# Altium PCB ROBOT_CONTROL.PcbDoc (part 1 of 2)
Units mm, origin at the board's own origin, x right, y up, seen from the top; angles counter-clockwise.
Board outline 110.37 x 59.34 mm, 2 copper layers (Top Layer, Bottom Layer); 66 components, 79 nets, 370 pads, 125 vias.
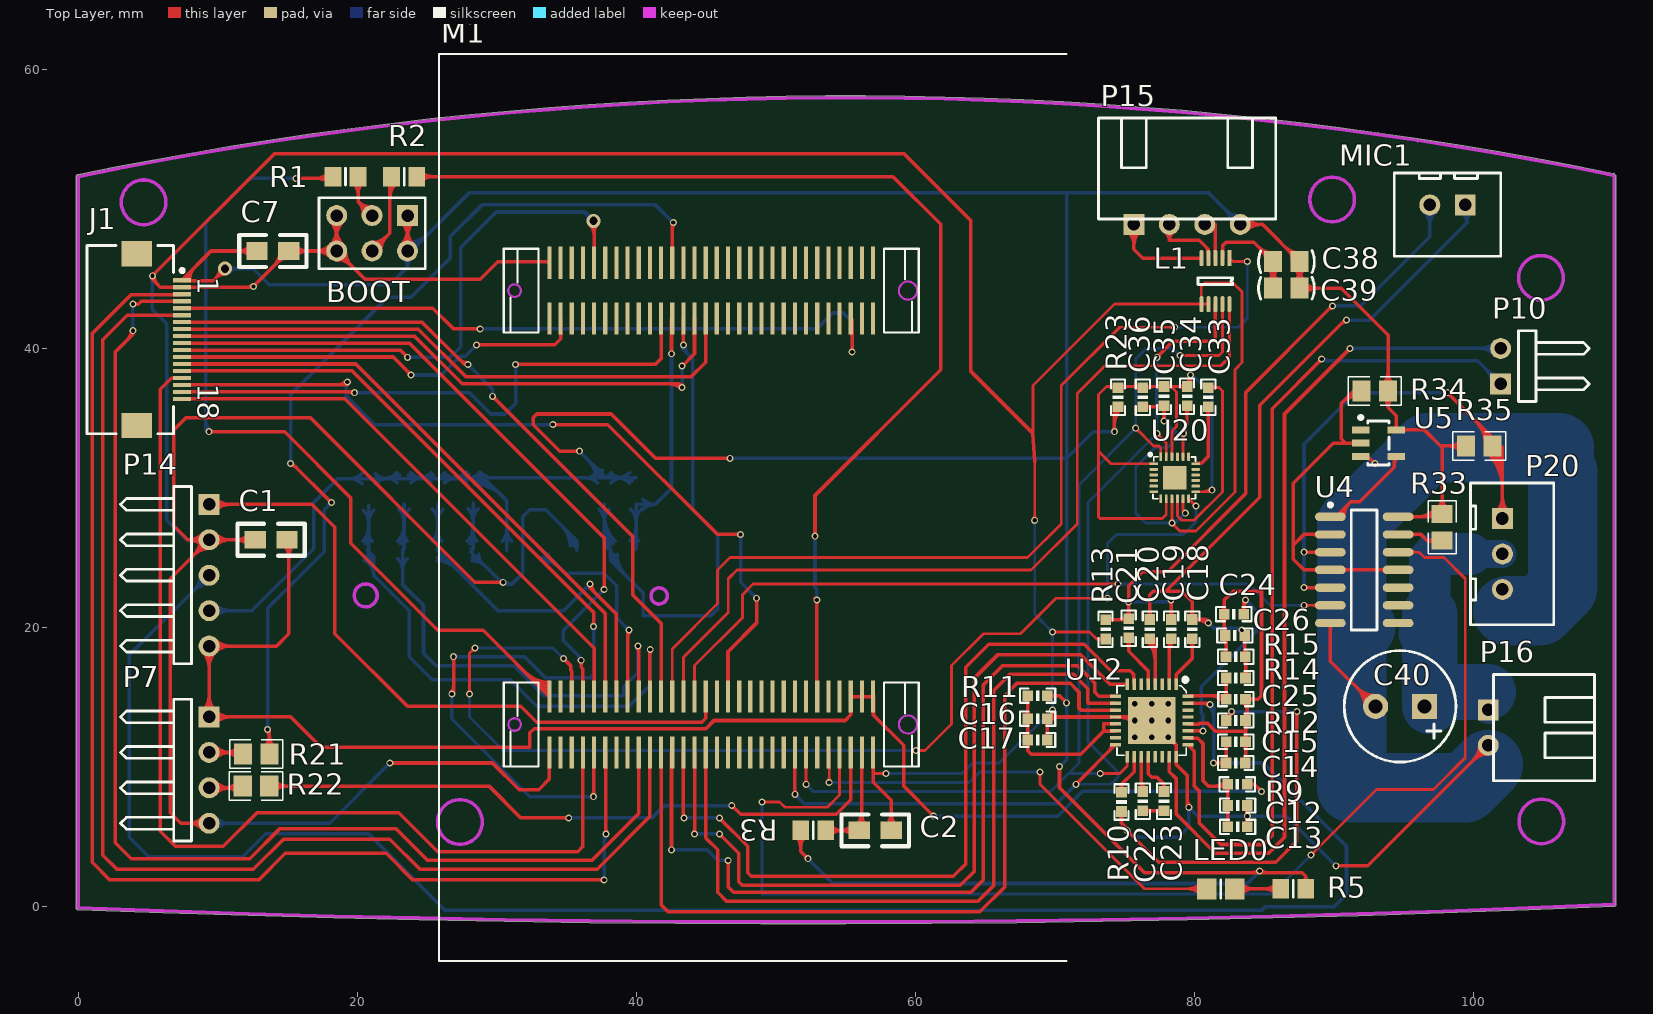
[diagram p0: Top Layer view]
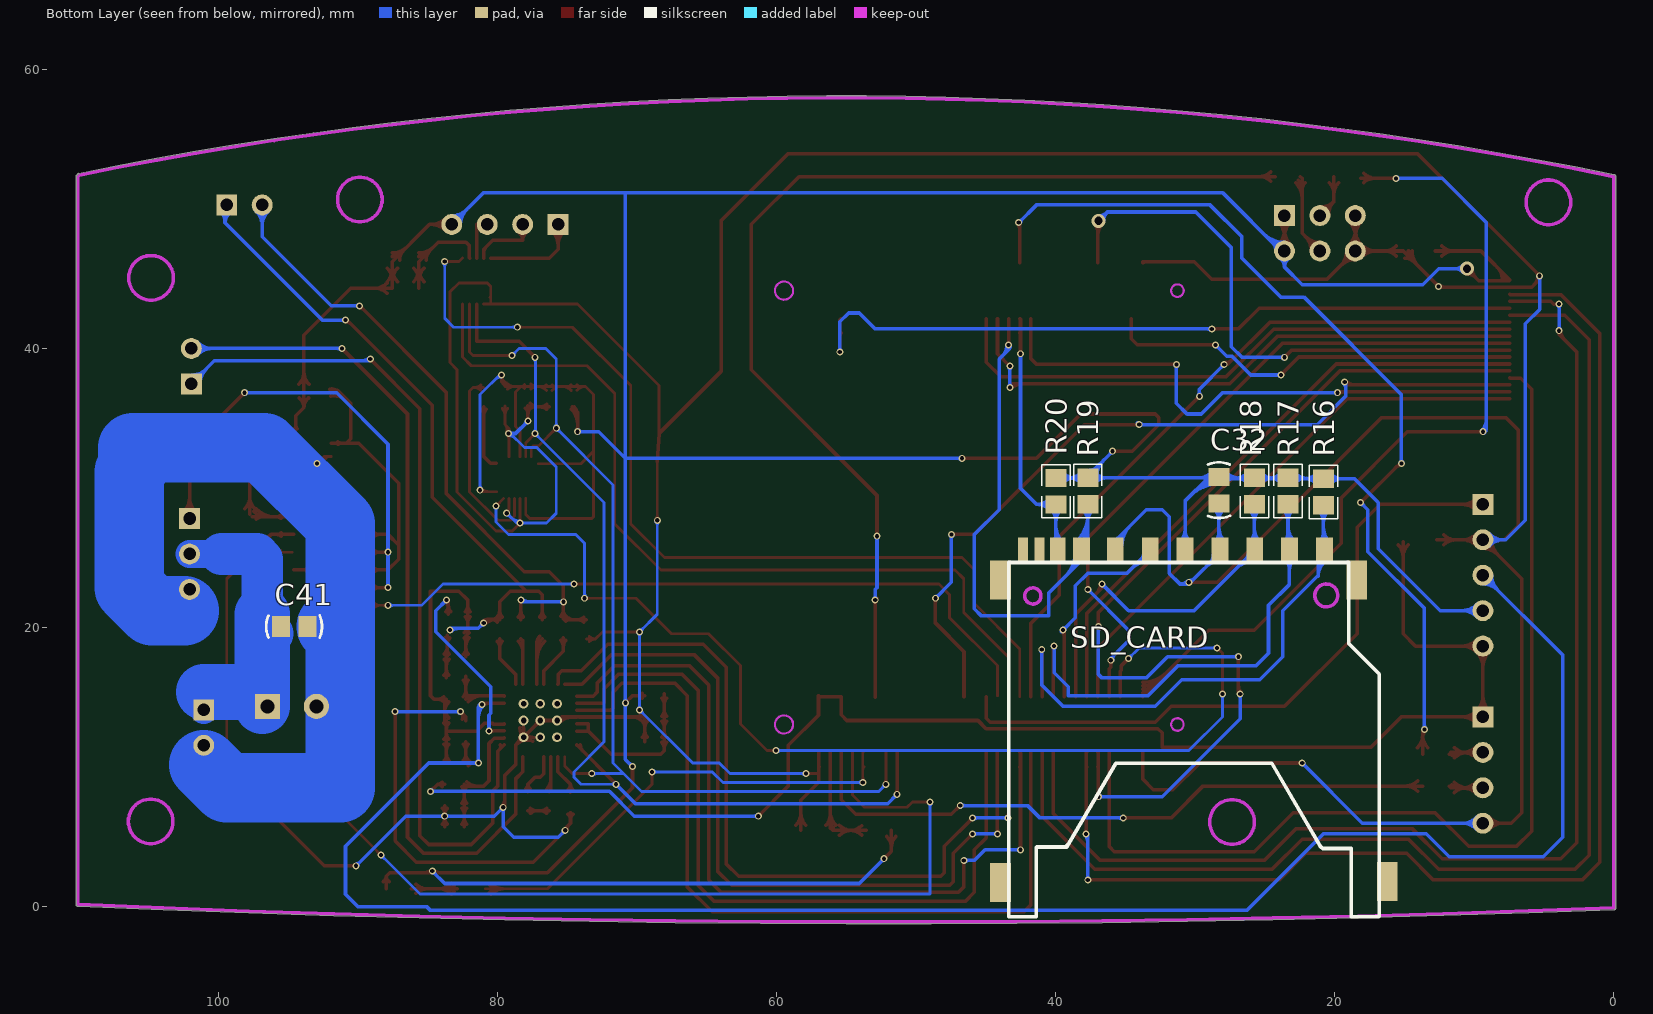
[diagram p1: Bottom Layer view, seen from below]

## Layer stack, top to bottom
Top Solder: solder mask 0.0102, Solder Resist, Dk 3.5
Top Layer: signal copper 0.0356
Dielectric1: dielectric 0.32, FR-4, Dk 4.8
Bottom Layer: signal copper 0.0356
Bottom Solder: solder mask 0.0102, Solder Resist, Dk 3.5

## Board outline
-0.12,-0.043 cw(c0,0) -0.127,0 -0.127,52.324 cw(c0,52.324) -0.01,52.451 cw(c0.026,52.329) 0.001,52.454 cw(c55.245,-214.452) 110.042,52.546 cw(c110.016,52.421) 110.141,52.447 cw(c110.109,52.324) 110.236,52.324 110.236,0.15 cw(c110.109,0.15) 110.104,0.023 cw(c52.086,1335.3) -0.009,-0.222 cw(c-0.004,-0.094)

## Design rules (kind name [scope] priority, off if disabled: settings)
Clearance [All] p1: gap=0.2 ignorepadtopadclearanceinfootprint=FALSE except(0: Arc-Hole Track-Hole SMDPad-Hole THPad-Hole Via-Hole Fill-Hole Poly-Hole Region-Hole Text-Hole)
PolygonConnect [All] p1: connectstyle=Relief reliefconductorwidth=0.254 reliefentries=4 polygonreliefangle="90 Angle" airgapwidth=0.254
RoutingVias [All] p1: holewidth=0.711 width=1.27 viastyle="Through Hole" minholewidth=0.711 minwidth=1.27 maxholewidth=0.711 maxwidth=1.27
SilkToSolderMaskClearance SilkscreenOverComponentPads [IsPad] p1: minsilkscreentomaskgap=0.254 clearancetoexposedcopper=TRUE
SolderMaskExpansion [All] p1: expansion=0.102
Width [All] p1: maxlimit=5 minlimit=0.203 preferedwidth=0.254
29 further rules are at their usual default settings.

## Components (designator, comment, footprint, x,y, rotation, side; value= is the part's Value field where it differs from the comment)
BOOT "Header 3X2" HDR2X3 23.622,49.53 r180 top
C1 "104" 0805 12.7,26.289 r0 top
C2 "104" 0805 58.293,5.459 r180 top
C7 "104" 0805 12.827,46.992 r0 top
C12 "10uF" 0603P 83.121,7.237 r180 top
C13 "104" 0603P 83.121,5.713 r180 top
C14 "104" 0603P 82.982,10.287 r0 top
C15 "10uF" 0603P 82.995,11.813 r0 top
C16 "10uF" 0603P 68.783,13.462 r180 top
C17 "104" 0603P 68.783,11.938 r180 top
C18 "1uF" 0603P 79.881,19.875 r90 top
C19 "1uF" 0603P 78.357,19.875 r90 top
C20 "1uF" 0603P 76.833,19.875 r90 top
C21 "1uF" 0603P 75.311,19.939 r90 top
C22 "104" 0603P 76.329,7.556 r270 top
C23 "104" 0603P 77.853,7.556 r270 top
C24 "10uf" 0603P 82.855,20.955 r0 top
C25 "10uf" 0603P 83.007,14.859 r180 top
C26 "221" 0603P 82.931,19.431 r0 top
C32 "Cap" C-RAD-0805 28.321,29.845 r90 bottom
C33 "Cap" 0603P 81.026,36.5 r90 top
C34 "Cap" 0603P 79.502,36.576 r90 top
C35 "Cap" 0603P 77.851,36.576 r90 top
C36 "Cap" 0603P 76.327,36.5 r90 top
C38 "Cap" C-RAD-0805 86.622,46.228 r180 top
C39 "Cap" C-RAD-0805 86.622,44.323 r180 top
C40 "Cap Pol" C-RB-8 96.52,14.351 r180 top
C41 "Cap" C-RAD-0805 94.615,20.066 r0 bottom
J1 "CL586-0553-7" FH12A-18S-0.5SH 5.842,40.64 r270 top
L1 "SN3193" DFN_10 82.534,46.482 r270 top
LED0 "LED1" 6-0805_M 81.915,1.27 r180 top
M1 "STM32F4&F7_CB" STM32F4&F7_CB 56.995,11.049 r90 top
MIC1 "MIC" HDR2X1_B1 99.441,50.292 r180 top
P7 "SCREEN" HDR1X4H 9.398,13.589 r270 top
P10 "horn" HDR1X2H 101.981,37.465 r90 top
P14 "Header 5" HDR1X5H 9.398,28.829 r270 top
P15 "Header 4" HDR4X1_B2 75.692,48.895 r0 top
P16 "Header 2" HDR2X1_B2 101.092,14.097 r270 top
P20 "Header 3" HDR3X1_B1 102.108,27.813 r270 top
R1 "Res2" 6-0805_N 19.177,52.324 r0 top
R2 "Res2" 6-0805_N 23.379,52.324 r0 top
R3 "Res2" 6-0805_N 52.705,5.461 r180 top
R5 "Res2" 6-0805_N 87.111,1.27 r0 top
R9 "0R" 0603P 83.109,8.763 r0 top
R10 "10K" 0603P 74.803,7.493 r90 top
R11 "10R" 0603P 68.783,15.113 r180 top
R12 "0R" 0603P 82.995,13.337 r0 top
R13 "0R" 0603P 73.66,19.863 r90 top
R14 "680R" 0603P 82.995,16.385 r0 top
R15 "47K" 0603P 82.982,17.907 r0 top
R16 "Res1" 0805-1 20.828,29.718 r90 bottom
R17 "Res1" 0805-1 23.368,29.784 r90 bottom
R18 "Res1" 0805-1 25.781,29.784 r90 bottom
R19 "Res1" 0805-1 37.719,29.784 r90 bottom
R20 "Res1" 0805-1 40.005,29.779 r90 bottom
R21 "Res1" 0805-1 12.766,10.922 r180 top
R22 "Res1" 0805-1 12.761,8.636 r180 top
R23 "Res1" 0603P 74.551,36.512 r270 top
R33 "Res1" 0805-1 97.79,27.178 r90 top
R34 "Res1" 0805-1 92.964,36.957 r0 top
R35 "Res1" 0805-1 100.457,33.02 r180 top
SD_CARD "sd card" SDCARD_L 23.266,25.562 r180 bottom
U4 "74HC126D" SOP-14N 92.202,24.13 r0 top
U5 "SN74AHV" SOT-23-5 91.948,34.163 r0 top
U12 "WM8978" qfn32 76.962,13.335 r270 top
U20 "MPU9250" QFN24-t 77.114,31.737 r0 top

## Footprints (in the part's own frame and the unit in brackets; to place one, negate y for a bottom-side part, rotate by r counter-clockwise, add the part's x,y. Pads: shape width x height; smd on the part's side, far side on the other; paste and mask are expansions set on the pad)
6-0805_M [mm] "Chip Resistor, Body 2.0x1.2mm, IPC Low Density"
  rect 1.4x1.5 smd: 1(-1,0) 2(1,0)
  silkscreen extent 0,-0.65 0,0.65, body extent -1.07,-0.7 1.07,0.7, height 0.7
6-0805_N [mm] "Chip Resistor, Body 2.0x1.2mm, IPC Medium Density"
  rect 1.2x1.4 smd: 1(-0.9,0) 2(0.9,0)
  silkscreen extent 0,-0.6 0,0.6, body extent -1.07,-0.7 1.07,0.7, height 0.7
0603P [mil]
  rect 30x30 smd: 1(-27,0) 2(27.5,-0.06)
  silkscreen extent -50,-20 50,20
0805 [mil]
  rect 60x50 smd: 1(0,-0.06) 2(90,-0.06)
  silkscreen extent -50,-45 140,45
0805-1 [mm] "贴片带丝印"
  rect 1.3x1.5 smd: 1(-0.95,0) 2(0.95,0)
  silkscreen extent -1.91,-1.02 1.91,1.02, body extent -1.14,-0.51 1.14,0.51, height 1
C-RAD-0805 [mm] "贴片电容"
  rect 1.3x1.5 smd: 1(-0.95,0) 2(0.95,0)
  silkscreen extent -2,-0.79 2,0.79, body extent -1.27,-0.64 1.27,0.64, height 0.9
C-RB-8 [mm] "35V 220UF电容"
  rect 1.8x1.8 hole 1: 1(0,0)
  round 1.8 hole 1: 2(3.5,0)
  silkscreen extent -2.25,-4 5.75,4
DFN_10 [mm]
  rect 1.16x0.3 smd: 1(0,0)
  oval 1.16x0.3 smd: 2(0,-0.5) 3(0,-1) 4(0,-1.5) 5(0,-2) 6(3.3,-2) 7(3.3,-1.5) 8(3.3,-1) 9(3.3,-0.5) 10(3.3,0)
  silkscreen extent 1.41,-2.25 1.89,0.25
FH12A-18S-0.5SH [mm] "Connector; FH12 Series; 18 Position; 0.5mm Spaced Top Contact"
  rect 0.3x1.3 smd: 1(-4.25,1.625) 2(-3.75,1.625) 3(-3.25,1.625) 4(-2.75,1.625) 5(-2.25,1.625) 6(-1.75,1.625) 7(-1.25,1.625) 8(-0.75,1.625) 9(-0.25,1.625) 10(0.25,1.625) 11(0.75,1.625) 12(1.25,1.625) 13(1.75,1.625) 14(2.25,1.625) 15(2.75,1.625) 16(3.25,1.625) 17(3.75,1.625) 18(4.25,1.625)
  rect 1.8x2.2 smd: 19(-6.15,-1.625) 20(6.15,-1.625)
  silkscreen extent -6.75,-5.2 6.75,1.75
HDR1X2H [mm] "Connector; Header; 2 Position; Right Angle"
  rect 1.5x1.5 hole 0.9: 1(0,0)
  round 1.5 hole 0.9: 2(2.54,0)
  silkscreen extent -1.27,-6.35 3.81,-1.27
HDR1X4H [mm] "Connector; Header; 4 Position; Right Angle"
  rect 1.5x1.5 hole 0.9: 1(0,0)
  round 1.5 hole 0.9: 2(2.54,0) 3(5.08,0) 4(7.62,0)
  silkscreen extent -1.27,-6.35 8.89,-1.27
HDR1X5H [mm] "Connector; Header; 5 Position; Right Angle"
  rect 1.5x1.5 hole 0.9: 1(0,0)
  round 1.5 hole 0.9: 2(2.54,0) 3(5.08,0) 4(7.62,0) 5(10.16,0)
  silkscreen extent -1.27,-6.35 11.43,-1.27
HDR2X1_B1 [mm] "Connector; Header; 4 Position"
  rect 1.5x1.5 hole 0.9: 1(0,0)
  round 1.5 hole 0.9: 2(2.54,0)
  silkscreen extent -2.54,-2.29 5.08,3.68, body extent -2.41,-2.16 5.08,3.56, height 1.5
HDR2X1_B2 [mm] "Connector; Header; 4 Position"
  rect 1.5x1.5 hole 0.9: 1(0,0)
  round 1.5 hole 0.9: 2(2.54,0)
  silkscreen extent -2.54,0.38 5.08,7.62, body extent -2.54,0.38 5.08,7.62, height 1.5
HDR2X3 [mm]
  rect 1.5x1.5 hole 0.9: 1(0,0)
  round 1.5 hole 0.9: 2(0,2.54) 3(2.54,0) 4(2.54,2.54) 5(5.08,0) 6(5.08,2.54)
  silkscreen extent -1.27,-1.27 6.35,3.81
HDR3X1_B1 [mm] "Connector; Header; 3 Position"
  rect 1.5x1.5 hole 0.9: 1(0,0)
  round 1.5 hole 0.9: 2(2.54,0) 3(5.08,0)
  silkscreen extent -2.54,-2.29 7.62,3.68, body extent -2.54,-2.29 7.62,3.68, height 1.5
HDR4X1_B2 [mm] "Connector; Header; 4 Position"
  rect 1.5x1.5 hole 0.9: 1(0,0)
  round 1.5 hole 0.9: 2(2.54,0) 3(5.08,0) 4(7.62,0)
  silkscreen extent -2.54,0.38 10.16,7.62, body extent -2.54,0.38 10.16,7.62, height 1.5
QFN24-t [mm]
  rrect50% 0.6x0.2 smd: 1(0,0) 2(0,-0.4) 3(0,-0.8) 4(0,-1.2) 5(0,-1.6) 6(0,-2) 13(3,-2) 14(3,-1.6) 15(3,-1.2) 16(3,-0.8) 17(3,-0.4) 18(3,0)
  rrect50% 0.2x0.6 smd: 7(0.5,-2.5) 8(0.9,-2.5) 9(1.3,-2.5) 10(1.7,-2.5) 11(2.1,-2.5) 12(2.5,-2.5) 19(2.5,0.5) 20(2.1,0.5) 21(1.7,0.5) 22(1.3,0.5) 23(0.9,0.5) 24(0.5,0.5)
  rect 1.7x1.7 smd: 25(1.499,-1.003)
  silkscreen extent -0.36,-2.5 3,0.76
qfn32 [mm]
  rect 0.8x0.25 smd: 1(-2.601,1.75) 2(-2.601,1.25) 3(-2.601,0.75) 4(-2.601,0.25) 5(-2.601,-0.25) 6(-2.601,-0.75) 7(-2.601,-1.25) 8(-2.601,-1.75) 17(2.601,-1.75) 18(2.601,-1.25) 19(2.601,-0.75) 20(2.601,-0.25) 21(2.601,0.25) 22(2.601,0.75) 23(2.601,1.25) 24(2.601,1.75)
  rect 0.25x0.8 smd: 9(-1.75,-2.601) 10(-1.25,-2.601) 11(-0.75,-2.601) 12(-0.25,-2.601) 13(0.25,-2.601) 14(0.75,-2.601) 15(1.25,-2.601) 16(1.75,-2.601) 25(1.75,2.601) 26(1.25,2.601) 27(0.75,2.601) 28(0.25,2.601) 29(-0.25,2.601) 30(-0.75,2.601) 31(-1.25,2.601) 32(-1.75,2.601)
  rect 3.4x3.4 smd: 33(0,0)
  silkscreen extent -3.06,-2.49 2.49,2.55
SDCARD_L [mm]
  rect 1.2x1.8 smd: 1(0,0) 2(-2.489,0) 3(-4.983,-0.009) 4(-7.483,-0.009) 5(-9.983,-0.009) 6(-12.483,-0.009) 7(-14.908,-0.009) 9(2.517,-0.009)
  rect 1.1x1.8 smd: 8(-16.612,0)
  rect 0.7x1.8 smd: 10(-17.908,-0.009) 12(-19.101,0)
  rect 1.5x2.8 smd: 11(-20.726,-23.834) 11(-20.726,-2.143) 11(4.826,-2.143) 11(7.01,-23.784)
  Keep-Out Layer circle w0.254: c-18.39,-3.3 r0.58
  Keep-Out Layer circle w0.254: c2.642,-3.26 r0.82
  silkscreen extent -20.13,-26.3 6.44,-0.9
SOP-14N [mm] "SOP, 14-Leads,"
  oval 2.2x0.6 smd: 1(-2.425,3.81) 2(-2.425,2.54) 3(-2.425,1.27) 4(-2.425,0) 5(-2.425,-1.27) 6(-2.425,-2.54) 7(-2.425,-3.81) 8(2.425,-3.81) 9(2.425,-2.54) 10(2.425,-1.27) 11(2.425,0) 12(2.425,1.27) 13(2.425,2.54) 14(2.425,3.81)
  silkscreen extent -2.55,-4.3 0.93,4.78, body extent -2,-4.28 2,4.28, height 1.75
SOT-23-5 [mil]
  rect 50x20 smd: 1(0,0) 2(0,-37.4) 3(0,-74.8) 4(100,-74.8) 5(100,0)
  silkscreen extent 0,-99 80,35
STM32F4&F7_CB [mm]
  rect 2.3x0.3 smd: J1_1(0,0) J1_2(0,0.8) J1_3(0,1.6) J1_4(0,2.4) J1_5(0,3.2) J1_6(0,4) J1_7(0,4.8) J1_8(0,5.6) J1_9(0,6.4) J1_10(0,7.2) J1_11(0,8) J1_12(0,8.8) J1_13(0,9.6) J1_14(0,10.4) J1_15(0,11.2) J1_16(0,12) J1_17(0,12.8) J1_18(0,13.6) J1_19(0,14.4) J1_20(0,15.2) J1_21(0,16) J1_22(0,16.8) J1_23(0,17.6) J1_24(0,18.4) J1_25(0,19.2) J1_26(0,20) J1_27(0,20.8) J1_28(0,21.6) J1_29(0,22.4) J1_30(0,23.2) J1_31(4,23.2) J1_32(4,22.4) J1_33(4,21.6) J1_34(4,20.8) J1_35(4,20) J1_36(4,19.2) J1_37(4,18.4) J1_38(4,17.6) J1_39(4,16.8) J1_40(4,16) J1_41(4,15.2) J1_42(4,14.4) J1_43(4,13.6) J1_44(4,12.8) J1_45(4,12) J1_46(4,11.2) J1_47(4,10.4) J1_48(4,9.6) J1_49(4,8.8) J1_50(4,8) J1_51(4,7.2) J1_52(4,6.4) J1_53(4,5.6) J1_54(4,4.8) J1_55(4,4) J1_56(4,3.2) J1_57(4,2.4) J1_58(4,1.6) J1_59(4,0.8) J1_60(4,0) J2_1(31.1,0.001) J2_2(31.1,0.801) J2_3(31.1,1.601) J2_4(31.1,2.401) J2_5(31.1,3.201) J2_6(31.1,4.001) J2_7(31.1,4.801) J2_8(31.1,5.601) J2_9(31.1,6.401) J2_10(31.1,7.201) J2_11(31.1,8.001) J2_12(31.1,8.801) J2_13(31.1,9.601) J2_14(31.1,10.401) J2_15(31.1,11.201) J2_16(31.1,12.001) J2_17(31.1,12.801) J2_18(31.1,13.601) J2_19(31.1,14.401) J2_20(31.1,15.201) J2_21(31.1,16.001) J2_22(31.1,16.801) J2_23(31.1,17.601) J2_24(31.1,18.401) J2_25(31.1,19.201) J2_26(31.1,20.001) J2_27(31.1,20.801) J2_28(31.1,21.601) J2_29(31.1,22.401) J2_30(31.1,23.201) J2_31(35.1,23.201) J2_32(35.1,22.401) J2_33(35.1,21.601) J2_34(35.1,20.801) J2_35(35.1,20.001) J2_36(35.1,19.201) J2_37(35.1,18.401) J2_38(35.1,17.601) J2_39(35.1,16.801) J2_40(35.1,16.001) J2_41(35.1,15.201) J2_42(35.1,14.401) J2_43(35.1,13.601) J2_44(35.1,12.801) J2_45(35.1,12.001) J2_46(35.1,11.201) J2_47(35.1,10.401) J2_48(35.1,9.601) J2_49(35.1,8.801) J2_50(35.1,8.001) J2_51(35.1,7.201) J2_52(35.1,6.401) J2_53(35.1,5.601) J2_54(35.1,4.801) J2_55(35.1,4.001) J2_56(35.1,3.201) J2_57(35.1,2.401) J2_58(35.1,1.601) J2_59(35.1,0.801) J2_60(35.1,0.001)
  Keep-Out Layer circle w0.152: c2,25.7 r0.45
  Keep-Out Layer circle w0.152: c2,-2.5 r0.65
  Keep-Out Layer circle w0.152: c33.1,-2.499 r0.65
  Keep-Out Layer circle w0.152: c33.1,25.701 r0.45
  silkscreen extent -14.95,-13.87 50.05,31.13

## Part data
BOOT: "Header, 3-Pin, Dual row"
C1 C2 C7 C12 C13 C14 C15 C16 C17 C18 C19 C20 C21 C22 C23 C24 C25 C26: library part C
C32 C33 C34 C35 C36 C38 C39 C41: "无极性电容"
C40: "极性电解电容"
J1: "FH12 Series, \"Flip-Lock\" SMT/ZIF Connector - 0.5mm Spaced Top Contact"
L1 U4 U5: library part Component_1
LED0: library part LED2, "Typical RED, GREEN, YELLOW, AMBER GaAs LED"
M1: "F429/746 Core Board"
P7: library part "Header 4H", "Header, 4-Pin, Right Angle"
P10: library part "Header 2H", "Header, 2-Pin, Right Angle"
P14: "Header, 5-Pin"
P15 P16 P20: "接插件"
R1 R2 R3 R5: "Resistor"
R9 R10 R11 R12 R13 R14 R15: library part R
R16 R17 R18 R19 R20 R21 R22 R23 R33 R34 R35: "贴片电阻"
U12: "24bit ADC&DAC"
U20: "9轴运动处理传感器"

## Via types
v1: diameter 0.5, hole 0.3, Top Layer to Bottom Layer, 114 vias
v2: diameter 0.7, hole 0.4, Top Layer to Bottom Layer, 9 vias
v3: diameter 1, hole 0.6, Top Layer to Bottom Layer, 2 vias

## Nets (pads, with @x,y where several pads share a name; then routed paths per layer and width w, separated by ;. In a path a pad name is that pad's centre, name@x,y a point inside that pad or via, vN(x,y) a via of type N, cw(c..) or ccw(c..) an arc to the next point about the centre after c; other vN are vias at no path point)
9D_INT: M1.J1_33 U20.12 | length 87.8
  Top Layer w0.203: v1@27.962,15.345 ccw(c27.709,15.598) 28.067,15.598 ccw(c28.425,15.598) v1@28.172,15.345 ; v1(28.067,15.24) 28.067,18.161 v1(28.448,18.542) ; v1@28.3,18.542 cw(c27.941,18.542) 28.195,18.289 cw(c28.448,18.035) v1@28.448,18.394 ; v1(60.071,11.176) 60.706,11.176 62.611,13.081 62.611,17.272 64.897,19.558 67.564,19.558 70.104,22.098 v1(73.787,22.098) ; v1@60.176,11.071 cw(c60.429,10.818) 60.429,11.176 cw(c60.429,11.534) v1@60.176,11.281 ; v1@73.682,21.993 ccw(c73.429,21.74) 73.429,22.098 ccw(c73.429,22.456) v1@73.682,22.203 ; U20.12@79.614,29.237 v1@80.137,28.715 ; 79.875,28.977 cw(c79.6,28.702) v1@79.989,28.702 ; 79.905,28.946 ccw(c80.137,29.178) v1@80.137,28.85
  Top Layer w0.254: v1@34.798,17.657 cw(c34.798,17.36) 35.008,17.57 cw(c35.218,17.78) v1@34.921,17.78 ; v1(34.798,17.78) 35.306,17.272 35.306,16.942 ; M1.J1_33@35.395,15.049 35.395,16.853
  Bottom Layer w0.203: v1@27.962,15.135 cw(c27.709,14.882) 28.067,14.882 cw(c28.425,14.882) v1@28.172,15.135 ; v1(28.067,15.24) 28.067,13.589 30.48,11.176 v1(60.071,11.176) ; v1(28.448,18.542) 34.036,18.542 v1(34.798,17.78) ; v1@28.553,18.437 cw(c28.806,18.184) 28.806,18.542 cw(c28.806,18.9) v1@28.553,18.647 ; v1@34.65,17.78 ccw(c34.291,17.78) 34.545,18.033 ccw(c34.798,18.287) v1@34.798,17.928 ; v1@59.966,11.071 ccw(c59.713,10.818) 59.713,11.176 ccw(c59.713,11.534) v1@59.966,11.281 ; v1@73.682,22.203 ccw(c73.429,22.456) 73.787,22.456 ccw(c74.145,22.456) v1@73.892,22.203 ; v1(73.787,22.098) 73.787,26.035 74.422,26.67 79.248,26.67 80.137,27.559 v1(80.137,28.702) ; v1@80.032,28.597 cw(c79.779,28.344) 80.137,28.344 cw(c80.495,28.344) v1@80.242,28.597
+7.4V: C40.1 C41.2 P16.1 P20.2 | length 22.7
  Bottom Layer w2: 99.822,25.273 P20.2@102.108,25.273 ; P16.1@101.092,14.097 101.092,15.367
  Bottom Layer w3: C41.2@96.166,19.565 ccw(c94.392,21.339) 96.901,21.339 ; 96.901,20.955 96.901,24.892 97.282,25.273 99.822,25.273
  Bottom Layer w4: C40.1@96.901,14.351 96.901,20.955 ; 97.536,15.367 101.092,15.367
ADC_V: M1.J1_45 P14.1 | length 52
  Top Layer w0.254: P14.1@9.398,28.829 16.764,28.829 18.415,27.178 18.415,19.558 23.622,14.351 31.75,14.351 32.893,13.208 44.704,13.208 44.995,13.499 M1.J1_45@44.995,15.049 ; P14.1@9.659,28.568 cw(c10.289,27.938) 10.289,28.829 cw(c10.289,29.72) P14.1@9.659,29.09 ; P14.1@9.839,28.388 cw(c10.902,27.325) 10.902,28.829 cw(c10.902,30.333) P14.1@9.839,29.27
AGND: C14.2 C15.2 C24.1 C25.1 C26.1 R12.2 R15.1 U12.28 | length 36.1
  Top Layer w0.254: U12.28@79.563,13.085 79.567,13.081 80.337,13.081 80.406,13.15 80.957,13.15 81.534,12.573 83.693,12.573 ; C24.1@81.989,20.775 cw(c81.556,20.342) 82.169,20.342 cw(c82.782,20.342) C24.1@82.349,20.775 ; C24.1@81.989,21.135 ccw(c81.556,21.568) 82.169,21.568 ccw(c82.782,21.568) C24.1@82.349,21.135 ; C26.1@82.066,19.251 cw(c81.509,18.695) 82.296,18.695 ; C26.1@82.066,19.611 ccw(c81.816,19.86) 82.169,19.86 ; R15.1@82.116,18.087 ccw(c81.683,18.52) 82.296,18.52 ccw(c82.909,18.52) R15.1@82.476,18.087 ; 82.169,20.228 ccw(c83.042,20.228) C26.1@82.425,19.611 ; R15.1@82.296,17.907 82.296,19.38 C26.1@82.245,19.431 82.169,19.507 C24.1@82.169,20.955 82.169,21.971 82.804,22.606 84.836,22.606 84.836,15.113 84.582,14.859 C25.1@83.693,14.859 83.82,14.732 R12.2@83.82,13.335 ; 82.296,18.94 cw(c82.736,18.94) C26.1@82.425,19.251 ; C14.2@83.501,10.465 ccw(c83.036,10.929) 83.693,10.929 ; C15.2@83.513,11.631 cw(c83.08,11.198) 83.693,11.198 cw(c84.306,11.198) C15.2@83.873,11.631 ; C15.2@83.513,11.991 ccw(c83.08,12.424) 83.693,12.424 ccw(c84.306,12.424) C15.2@83.873,11.991 ; R12.2@83.513,13.155 cw(c83.08,12.722) 83.693,12.722 cw(c84.306,12.722) R12.2@83.873,13.155 ; R12.2@83.513,13.515 ccw(c82.773,14.255) 83.82,14.255 ; C25.1@83.513,14.679 cw(c82.773,13.939) 83.82,13.939 ; C14.2@83.68,10.285 83.693,10.298 C15.2@83.693,11.811 83.693,12.573 ; 83.693,10.868 ccw(c84.263,10.868) C14.2@83.86,10.465 ; R12.2@83.693,13.335 83.693,12.573 ; C25.1@83.873,14.679 cw(c84.306,14.246) 84.306,14.859 cw(c84.306,15.472) C25.1@83.873,15.039
BOOT0: M1.J1_31 R1.1 | length 69.1
  Top Layer w0.254: v1(9.398,34.036) 14.808,34.036 19.555,29.289 19.555,26.038 25.797,19.796 29.048,19.796 M1.J1_31@33.795,15.049 ; v1@9.485,33.949 cw(c9.695,33.739) 9.695,34.036 cw(c9.695,34.333) v1@9.485,34.123 ; v1(15.621,52.197) R1.1@18.161,52.197 ; v1@15.708,52.11 cw(c15.918,51.9) 15.918,52.197 cw(c15.918,52.494) v1@15.708,52.284 ; 17.07,52.197 ccw(c17.07,53.431) R1.1@17.943,52.558 ; 17.2,52.197 cw(c17.2,51.147) R1.1@17.943,51.89 ; 32.049,16.795 ccw(c33.795,18.542) M1.J1_31@33.795,16.072 ; 32.482,16.362 ccw(c33.795,17.675) M1.J1_31@33.795,15.818 ; 32.916,15.928 ccw(c33.795,16.807) M1.J1_31@33.795,15.564 ; 33.349,15.495 ccw(c33.795,15.94) M1.J1_31@33.795,15.31 ; M1.J1_31@33.783,15.061 ccw(c33.795,15.073) M1.J1_31@33.795,15.056
  Bottom Layer w0.254: 9.144,34.333 ccw(c9.695,34.333) v1@9.305,33.943 ; 9.144,34.946 ccw(c10.308,34.946) v1@9.485,34.123 ; v1(9.398,34.036) 9.271,34.036 9.144,34.163 9.144,49.022 12.319,52.197 v1(15.621,52.197) ; v1@15.534,52.11 ccw(c15.324,51.9) 15.324,52.197 ccw(c15.324,52.494) v1@15.534,52.284
BOOT1: M1.J1_55 R2.2 | length 80.7
  Top Layer w0.254: R2.2@24.279,52.324 58.42,52.324 61.849,48.895 61.849,38.481 52.832,29.464 v1(52.832,26.543) v1@52.832,26.416 ; R2.2@24.613,51.99 cw(c25.421,51.182) 25.421,52.324 cw(c25.421,53.466) R2.2@24.613,52.658 ; v1@52.745,26.63 ccw(c52.535,26.84) 52.832,26.84 ccw(c53.129,26.84) v1@52.919,26.63 ; v1@52.832,22.098 v1(52.959,21.971) M1.J1_55@52.959,14.986 ; v1@52.872,21.884 cw(c52.662,21.674) 52.959,21.674 cw(c53.256,21.674) v1@53.046,21.884
  Bottom Layer w0.254: v1@52.745,26.456 cw(c52.535,26.246) 52.832,26.246 cw(c53.129,26.246) v1@52.919,26.456 ; v1(52.832,26.543) 52.832,22.86 52.959,22.733 v1(52.959,21.971) ; v1@52.872,22.058 ccw(c52.662,22.268) 52.959,22.268 ccw(c53.256,22.268) v1@53.046,22.058
DATA: P20.1 R35.1 U4.3 U4.5 | length 58.6
  Top Layer w0.254: v1(87.884,22.86) U4.5@89.777,22.86 ; v1(87.884,25.4) U4.3@89.777,25.4 ; v1@87.971,22.773 cw(c88.181,22.563) 88.181,22.86 cw(c88.181,23.157) v1@87.971,22.947 ; v1@87.971,25.313 cw(c88.181,25.103) 88.181,25.4 cw(c88.181,25.697) v1@87.971,25.487 ; U4.5@88.855,22.738 ccw(c88.559,22.442) 88.559,22.86 ccw(c88.559,23.278) U4.5@88.855,22.982 ; U4.3@88.855,25.278 ccw(c88.559,24.982) 88.559,25.4 ccw(c88.559,25.818) U4.3@88.855,25.522 ; v1@98.171,36.707 cw(c98.171,36.41) 98.381,36.62 cw(c98.591,36.83) v1@98.294,36.83 ; v1(98.171,36.83) 102.108,32.893 P20.1@102.108,27.813 ; 100.179,34.822 cw(c98.477,33.12) R35.1@100.884,33.12 ; 100.613,34.388 cw(c99.344,33.12) R35.1@101.138,33.12 ; R35.1@101.037,32.55 cw(c98.452,29.965) 102.108,29.965 ; 101.046,33.955 cw(c100.211,33.12) R35.1@101.392,33.12 ; R35.1@101.217,32.73 cw(c99.065,30.578) 102.108,30.578 ; R35.1@101.396,32.909 cw(c99.678,31.191) 102.108,31.191 ; R35.1@101.576,33.089 cw(c100.292,31.805) 102.108,31.805 ; P20.1@101.667,28.254 ccw(c100.604,29.317) 102.108,29.317 ccw(c103.612,29.317) P20.1@102.549,28.254 ; R35.1@101.756,33.269 cw(c100.905,32.418) 102.108,32.418 ; P20.1@101.847,28.074 ccw(c101.217,28.704) 102.108,28.704 ccw(c102.999,28.704) P20.1@102.369,28.074
  Bottom Layer w0.254: v1@87.797,22.947 ccw(c87.587,23.157) 87.884,23.157 ccw(c88.181,23.157) v1@87.971,22.947 ; v1@87.797,25.313 cw(c87.587,25.103) 87.884,25.103 cw(c88.181,25.103) v1@87.971,25.313 ; v1@87.797,25.487 ccw(c87.587,25.697) 87.884,25.697 ccw(c88.181,25.697) v1@87.971,25.487 ; v1(87.884,22.86) v1(87.884,25.4) 87.884,33.147 91.567,36.83 v1(98.171,36.83) ; v1@98.084,36.743 ccw(c97.874,36.533) 97.874,36.83 ccw(c97.874,37.127) v1@98.084,36.917
DCMI_D0: J1.8 M1.J2_16 | length 42.5
  Top Layer w0.254: J1.8@7.467,41.39 24.396,41.39 27.813,37.973 43.942,37.973 44.994,39.025 M1.J2_16@44.994,42.149
DCMI_D1: J1.9 M1.J2_17 | length 45.4
  Top Layer w0.254: J1.9@7.467,40.89 24.126,40.89 27.551,37.465 43.053,37.465 v1(43.307,37.211) ; 42.397,37.465 cw(c42.397,36.301) v1@43.22,37.124 ; 43.01,37.465 cw(c43.01,36.914) v1@43.4,37.304 ; v1(43.307,38.735) 44.194,39.622 M1.J2_17@44.194,42.149 ; v1@43.307,38.858 ccw(c43.307,39.155) 43.517,38.945 ccw(c43.727,38.735) v1@43.43,38.735
  Bottom Layer w0.254: v1@43.22,37.298 ccw(c43.01,37.508) 43.307,37.508 ccw(c43.604,37.508) v1@43.394,37.298 ; v1@43.22,38.648 cw(c43.01,38.438) 43.307,38.438 cw(c43.604,38.438) v1@43.394,38.648 ; v1(43.307,37.211) v1(43.307,38.735)
DCMI_D2: J1.10 M1.J1_34 | length 50.9
  Top Layer w0.254: J1.10@7.467,40.39 23.745,40.39 37.719,26.416 v1(37.719,22.733) ; v1@35.981,17.566 cw(c35.771,17.356) 36.068,17.356 cw(c36.365,17.356) v1@36.155,17.566 ; v1(36.068,17.653) 36.068,17.145 36.195,17.018 M1.J1_34@36.195,15.049 ; v1@37.632,22.82 ccw(c37.422,23.03) 37.719,23.03 ccw(c38.016,23.03) v1@37.806,22.82
  Bottom Layer w0.254: 35.768,18.08 cw(c35.341,17.653) v1@35.945,17.653 ; v1@36.068,17.78 34.798,19.05 34.798,19.812 v1(37.719,22.733) ; v1@37.596,22.733 cw(c37.299,22.733) 37.509,22.523 cw(c37.719,22.313) v1@37.719,22.61
DCMI_D3: J1.11 M1.J2_35 | length 45.2
  Top Layer w0.254: J1.11@7.467,39.89 23.102,39.89 v1(23.622,39.37) ; v1@23.499,39.37 ccw(c23.202,39.37) 23.412,39.58 ccw(c23.622,39.79) v1@23.622,39.493 ; v3@36.693,48.885 cw(c35.967,48.159) 36.994,48.159 ; M1.J2_35@36.994,46.149 v3@36.994,49.112 ; 36.994,48.338 cw(c37.768,48.338) v3@37.221,48.885
  Bottom Layer w0.254: v1(23.622,39.37) 26.67,39.37 27.432,40.132 27.432,47.244 29.972,49.784 36.322,49.784 ; v1@23.709,39.283 cw(c23.919,39.073) 23.919,39.37 cw(c23.919,39.667) v1@23.709,39.457 ; v3@36.584,49.15 ccw(c35.69,49.152) 36.322,49.784 ; v3@36.956,49.522 cw(c36.954,50.416) 36.322,49.784 ; v3@36.994,49.112 v3(36.957,49.149) 36.322,49.784
DCMI_D4: J1.12 M1.J2_29 | length 32.1
  Top Layer w0.254: J1.12@7.467,39.39 22.586,39.39 v1(23.876,38.1) ; v1@23.753,38.1 ccw(c23.456,38.1) 23.666,38.31 ccw(c23.876,38.52) v1@23.876,38.223 ; v1(28.575,40.259) 34.163,40.259 34.594,40.69 M1.J2_29@34.594,42.149 ; v1@28.662,40.172 cw(c28.872,39.962) 28.872,40.259 cw(c28.872,40.556) v1@28.662,40.346
  Bottom Layer w0.254: v1(23.876,38.1) 26.042,38.1 27.381,39.439 27.755,39.439 v1(28.575,40.259) ; v1@23.963,38.013 cw(c24.173,37.803) 24.173,38.1 cw(c24.173,38.397) v1@23.963,38.187 ; v1@28.452,40.259 cw(c28.155,40.259) 28.365,40.049 cw(c28.575,39.839) v1@28.575,40.136
DCMI_D5: J1.13 M1.J1_36 | length 43.7
  Top Layer w0.254: J1.13@7.467,38.89 19.911,38.89 37.795,21.006 M1.J1_36@37.795,15.049
DCMI_D6: J1.14 M1.J1_26 | length 76
  Top Layer w0.254: J1.14@7.467,38.39 19.649,38.39 36.957,21.082 v1(36.957,20.066) ; v1@26.71,15.327 ccw(c26.193,15.844) 26.924,15.844 ; v1(26.797,15.24) 26.924,15.367 v1(26.924,17.907) ; v1@26.837,17.82 cw(c26.627,17.61) 26.924,17.61 cw(c27.221,17.61) v1@27.011,17.82 ; v1@36.87,7.961 ccw(c36.66,8.171) 36.957,8.171 ccw(c37.254,8.171) v1@37.044,7.961 ; v1@36.87,20.153 ccw(c36.66,20.363) 36.957,20.363 ccw(c37.254,20.363) v1@37.044,20.153 ; v1(36.957,7.874) 36.957,11.011 M1.J1_26@36.995,11.049 ; M1.J1_26@36.957,9.902 cw(c37.142,9.902) M1.J1_26@37.011,10.033
  Bottom Layer w0.254: v1@26.71,15.153 cw(c26.5,14.943) 26.797,14.943 cw(c27.094,14.943) v1@26.884,15.153 ; v1@26.797,15.113 26.797,13.462 32.385,7.874 v1(36.957,7.874) ; v1@26.797,17.907 v1(26.924,17.907) 32.004,17.907 33.528,16.383 36.703,16.383 36.957,16.637 v1(36.957,20.066) ; v1@27.011,17.82 cw(c27.221,17.61) 27.221,17.907 cw(c27.221,18.204) v1@27.011,17.994 ; v1@36.87,7.787 ccw(c36.66,7.577) 36.66,7.874 ccw(c36.66,8.171) v1@36.87,7.961 ; v1@36.87,19.979 cw(c36.66,19.769) 36.957,19.769 cw(c37.254,19.769) v1@37.044,19.979
DCMI_D7: J1.15 M1.J1_27 | length 73.4
  Top Layer w0.254: J1.15@7.467,37.89 7.444,37.867 6.682,37.867 5.899,37.084 5.899,5.404 6.985,4.318 10.414,4.318 12.827,6.731 22.987,6.731 25.781,3.937 35.814,3.937 36.195,4.318 M1.J1_27@36.195,11.049
DCMI_HREF: J1.5 M1.J2_3 | length 56.2
  Top Layer w0.254: J1.5@7.467,42.89 25.436,42.89 26.924,41.402 v1(28.829,41.402) ; v1@28.742,41.315 ccw(c28.532,41.105) 28.532,41.402 ccw(c28.532,41.699) v1@28.742,41.489 ; M1.J2_3@55.378,41.132 cw(c55.085,40.84) 55.499,40.84 ; M1.J2_3@55.394,42.149 55.499,42.044 v1(55.499,39.751) ; v1@55.412,39.838 ccw(c55.202,40.048) 55.499,40.048 ccw(c55.796,40.048) v1@55.586,39.838
  Bottom Layer w0.254: v1(28.829,41.402) 52.959,41.402 54.102,42.545 54.864,42.545 55.499,41.91 v1(55.499,39.751) ; v1@28.916,41.315 cw(c29.126,41.105) 29.126,41.402 cw(c29.126,41.699) v1@28.916,41.489 ; v1@55.412,39.838 ccw(c55.202,40.048) 55.499,40.048 ccw(c55.796,40.048) v1@55.586,39.838
DCMI_PCLK: J1.16 M1.J1_47 | length 62.7
  Top Layer w0.254: J1.16@7.467,37.39 19.102,37.39 v1(19.304,37.592) ; 18.519,37.39 ccw(c18.519,38.377) v1@19.217,37.679 ; 19.133,37.39 ccw(c19.133,37.763) v1@19.397,37.499 ; v1(34.036,34.544) 37.973,34.544 45.847,26.67 v1(47.498,26.67) ; v1@34.123,34.457 cw(c34.333,34.247) 34.333,34.544 cw(c34.333,34.841) v1@34.123,34.631 ; M1.J1_47@46.595,15.049 46.595,18.274 48.641,20.32 v1(48.641,22.098) ; v1@47.411,26.583 ccw(c47.201,26.373) 47.201,26.67 ccw(c47.201,26.967) v1@47.411,26.757 ; v1@48.554,22.011 cw(c48.344,21.801) 48.641,21.801 cw(c48.938,21.801) v1@48.728,22.011
  Bottom Layer w0.254: 19.235,37.128 cw(c19.768,37.128) v1@19.391,37.505 ; v1(19.304,37.592) 19.235,37.523 19.235,36.591 21.282,34.544 v1(34.036,34.544) v1@34.163,34.671 ; v1@33.949,34.457 ccw(c33.739,34.247) 33.739,34.544 ccw(c33.739,34.841) v1@33.949,34.631 ; v1@47.411,26.583 cw(c47.201,26.373) 47.498,26.373 cw(c47.795,26.373) v1@47.585,26.583 ; v1(47.498,26.67) 47.498,23.241 v1(48.641,22.098) ; v1@48.518,22.098 ccw(c48.221,22.098) 48.431,22.308 ccw(c48.641,22.518) v1@48.641,22.221
DCMI_PWDN: J1.18 M1.J1_35 | length 40.4
  Top Layer w0.254: J1.18@7.467,36.39 19.109,36.39 36.995,18.504 M1.J1_35@36.995,15.049
DCMI_RESET: J1.7 M1.J1_41 | length 53.4
  Top Layer w0.254: J1.7@7.467,41.89 24.658,41.89 27.686,38.862 v1(27.94,38.862) ; 27.296,39.252 ccw(c27.94,39.895) v1@27.94,38.985 ; v1@29.718,36.453 cw(c29.718,36.156) 29.928,36.366 cw(c30.138,36.576) v1@29.841,36.576 ; v1(29.718,36.576) 39.751,26.543 39.751,22.352 41.795,20.308 M1.J1_41@41.795,15.049
  Bottom Layer w0.254: v1@27.94,38.739 cw(c27.94,38.442) 28.15,38.652 cw(c28.36,38.862) v1@28.063,38.862 ; v1(27.94,38.862) 29.718,37.084 v1(29.718,36.576) ; v1@29.631,36.663 ccw(c29.421,36.873) 29.718,36.873 ccw(c30.015,36.873) v1@29.805,36.663
DCMI_SCL: J1.4 M1.J1_22 | length 90.5
  Top Layer w0.254: 3.547,40.631 ccw(c2.904,41.275) v1@3.814,41.275 ; v1(3.937,41.275) 3.937,41.021 2.667,39.751 2.667,4.572 3.81,3.429 12.319,3.429 14.478,5.588 22.787,5.588 25.073,3.302 36.83,3.302 40.195,6.667 M1.J1_22@40.195,11.049 ; v1(3.937,43.18) 4.318,43.18 4.528,43.39 J1.4@7.467,43.39 ; v1@4.024,43.093 cw(c4.234,42.883) 4.234,43.18 cw(c4.234,43.477) v1@4.024,43.267
  Bottom Layer w0.254: v1@3.85,41.362 ccw(c3.64,41.572) 3.937,41.572 ccw(c4.234,41.572) v1@4.024,41.362 ; v1@3.85,43.093 cw(c3.64,42.883) 3.937,42.883 cw(c4.234,42.883) v1@4.024,43.093 ; v1(3.937,41.275) v1(3.937,43.18)
DCMI_SDA: J1.6 M1.J1_21 | length 91
  Top Layer w0.254: J1.6@7.467,42.39 3.528,42.39 1.778,40.64 1.778,3.683 2.794,2.667 12.573,2.667 14.732,4.826 22.352,4.826 24.511,2.667 37.211,2.667 40.995,6.451 M1.J1_21@40.995,11.049
DCMI_VSYNC: J1.3 M1.J1_25 | length 95.7
  Top Layer w0.254: J1.3@7.467,43.89 7.444,43.867 3.808,43.867 1.016,41.075 1.016,3.175 2.286,1.905 12.954,1.905 14.859,3.81 22.098,3.81 24.003,1.905 v1(37.719,1.905) ; v1@37.632,1.818 ccw(c37.422,1.608) 37.422,1.905 ccw(c37.422,2.202) v1@37.632,1.992 ; v1@37.759,5.294 ccw(c37.549,5.504) 37.846,5.504 ccw(c38.143,5.504) v1@37.933,5.294 ; M1.J1_25@37.779,10.033 cw(c37.616,9.87) 37.846,9.87 ; M1.J1_25@37.795,11.049 37.846,10.998 v1(37.846,5.207)
  Bottom Layer w0.254: v1@37.632,1.992 ccw(c37.422,2.202) 37.719,2.202 ccw(c38.016,2.202) v1@37.806,1.992 ; v1(37.719,1.905) 37.719,5.08 v1(37.846,5.207) ; 37.719,4.603 cw(c38.45,4.603) v1@37.933,5.12
DCMI_XCLK: J1.17 M1.J2_20 | length 42.9
  Top Layer w0.254: J1.17@7.467,36.89 19.752,36.89 v1(19.812,36.83) ; 19.37,36.89 cw(c19.37,36.388) v1@19.725,36.743 ; v1(31.369,38.862) 41.402,38.862 41.794,39.254 M1.J2_20@41.794,42.149 ; v1@31.456,38.775 cw(c31.666,38.565) 31.666,38.862 cw(c31.666,39.159) v1@31.456,38.949
  Bottom Layer w0.254: v1(19.812,36.83) 28.067,36.83 29.591,35.306 30.607,35.306 31.369,36.068 v1(31.369,38.862) ; v1@19.899,36.743 cw(c20.109,36.533) 20.109,36.83 cw(c20.109,37.127) v1@19.899,36.917 ; v1@31.282,38.775 cw(c31.072,38.565) 31.369,38.565 cw(c31.666,38.565) v1@31.456,38.775
GND: BOOT.5 BOOT.6 C1.1 C2.1 C7.2 C12.1 C13.1 C16.1 C17.1 C32.1 C34.1 C35.1 C36.1 C40.2 C41.1 J1.2 L1.6 L1.7 M1.J1_1 M1.J1_30 M1.J2_31 P7.4 P14.2 P16.2 P20.3 R10.1 R12.1 R13.1 SD_CARD.3 SD_CARD.6 U4.7 U5.3 U12.12 U12.24 U12.33 U20.9 U20.11 U20.20 | length 631.5
  Top Layer w0.203: M1.J1_1@56.961,10.015 cw(c56.811,9.865) 57.023,9.865 ; M1.J1_1@57.023,10.414 57.023,9.525 v1(57.912,9.525) ; v1@57.807,9.42 ccw(c57.554,9.167) 57.554,9.525 ccw(c57.554,9.883) v1@57.807,9.63 ; 68.453,33.909 68.453,37.338 74.297,43.182 L1.6@80.518,43.182 ; v1@68.475,27.791 ccw(c68.222,28.044) 68.58,28.044 ccw(c68.938,28.044) v1@68.685,27.791 ; v1(68.58,27.686) 68.58,31.877 ; C16.1@69.469,13.462 69.592,13.585 69.85,13.843 v1(69.85,14.097) ; C16.1@69.719,13.712 ccw(c69.564,13.867) v1@69.735,14.004 ; v1(69.85,19.685) 72.517,19.685 73.025,19.177 ; v1@69.955,19.58 cw(c70.208,19.327) 70.208,19.685 cw(c70.208,20.043) v1@69.955,19.79 ; R13.1@73.454,18.988 ccw(c73.025,18.595) 73.025,19.177 ; R13.1@73.454,19.366 cw(c73.025,19.759) 73.025,19.177 ; R13.1@73.66,19.177 73.025,19.177 ; v1@78.309,27.592 ccw(c78.056,27.846) 78.414,27.846 ccw(c78.773,27.846) v1@78.519,27.592 ; v1@78.414,27.339 cw(c78.414,26.981) 78.668,27.234 cw(c78.921,27.487) v1@78.563,27.487 ; U20.9@78.414,29.237 v1(78.414,27.487) 78.978,26.924 80.137,26.924 82.931,29.718 82.931,38.481 83.439,38.989 83.439,44.069 82.804,44.704 80.772,44.704 80.518,44.45 L1.6@80.518,43.182 ; v1@79.143,33.804 cw(c78.971,33.632) 79.214,33.632 ; v1@79.197,33.888 cw(c79.572,34.041) 79.286,34.328 ; U20.11@79.214,29.237 79.214,28.355 v1(79.375,28.194) ; U20.20@79.214,32.237 79.214,34.256 79.502,34.544 ; 79.214,33.47 cw(c79.687,33.47) v1@79.353,33.804 ; C34.1@79.304,35.693 cw(c78.827,35.216) 79.502,35.216 cw(c80.177,35.216) C34.1@79.7,35.693 ; v1@79.385,33.965 cw(c79.879,34.167) 79.502,34.544 ; C34.1@79.502,35.89 79.502,34.544 ; 80.518,43.767 ccw(c80.689,43.767) L1.6@80.568,43.646 ; L1.7@81.034,43.182 L1.6@80.534,43.182 L1.6@80.518,43.182 ; U5.3@91.948,32.263 92.451,32.263 v1@92.837,31.877 ; U5.3@92.329,32.111 cw(c92.329,31.448) v1@92.797,31.917 ; v1@92.816,31.75 ccw(c92.457,31.75) 92.711,32.003 ccw(c92.964,32.257) v1@92.964,31.898
  Top Layer w0.254: v1@5.334,45.335 ccw(c5.334,45.632) 5.544,45.422 ccw(c5.754,45.212) 5.457,45.212 ccw(c6.367,45.212) 5.724,44.568 ; P14.2@8.775,26.289 cw(c7.271,26.289) 8.334,25.225 cw(c9.398,24.162) P14.2@9.398,25.666 ; P7.4@8.957,5.528 ccw(c7.894,4.465) 7.894,5.969 ccw(c7.894,7.473) P7.4@8.957,6.41 ; P14.2@8.957,25.848 ccw(c7.894,24.785) 7.894,26.289 ccw(c7.894,27.793) P14.2@8.957,26.73 ; P14.2@9.029,26.289 cw(c8.138,26.289) 8.768,25.659 cw(c9.398,25.029) P14.2@9.398,25.92 ; P7.4@9.137,5.708 ccw(c8.507,5.078) 8.507,5.969 ccw(c8.507,6.86) P7.4@9.137,6.23 ; P14.2@9.137,26.028 ccw(c8.507,25.398) 8.507,26.289 ccw(c8.507,27.18) P14.2@9.137,26.55 ; P7.4@9.398,5.969 7.366,5.969 6.604,6.731 6.604,23.495 P14.2@9.398,26.289 12.698,26.289 C1.1@12.7,26.287 ; P14.2@9.398,26.416 9.271,26.289 7.874,26.289 6.858,27.305 6.858,34.163 7.747,35.052 16.637,35.052 28.448,23.241 v1(30.48,23.241) ; P14.2@9.659,26.028 cw(c10.289,25.398) 10.289,26.289 cw(c10.289,27.18) P14.2@9.659,26.55 ; P14.2@9.839,25.848 cw(c10.902,24.785) 10.902,26.289 cw(c10.902,27.793) P14.2@9.839,26.73 ; 11.343,26.289 cw(c11.343,25.057) C1.1@12.214,25.928 ; 11.351,26.289 ccw(c11.351,27.51) C1.1@12.214,26.647 ; 12.131,44.39 ccw(c12.131,44.892) v1@12.486,44.537 ; v1@12.573,44.573 ccw(c12.573,44.87) 12.783,44.66 ccw(c12.993,44.45) v1@12.696,44.45 ; 14.029,45.906 ccw(c12.945,46.99) C7.2@14.478,46.99 ; 14.336,46.213 cw(c14.986,45.562) C7.2@14.986,46.482 ; 14.463,46.34 ccw(c13.812,46.99) C7.2@14.732,46.99 ; C7.2@15.599,46.631 cw(c16.466,45.764) 16.466,46.99 cw(c16.466,48.216) C7.2@15.599,47.349 ; BOOT.6@18.101,46.549 ccw(c17.038,45.486) 17.038,46.99 ccw(c17.038,48.494) 18.101,47.431 ccw(c17.038,48.494) 18.542,48.494 ccw(c20.046,48.494) BOOT.6@18.983,47.431 ; BOOT.5@18.101,49.089 cw(c17.038,48.026) 18.542,48.026 cw(c20.046,48.026) BOOT.5@18.983,49.089 ; BOOT.6@18.281,46.729 ccw(c17.651,46.099) 17.651,46.99 ccw(c17.651,47.881) 18.281,47.251 ccw(c17.651,47.881) 18.542,47.881 ccw(c19.433,47.881) BOOT.6@18.803,47.251 ; BOOT.5@18.281,49.269 cw(c17.651,48.639) 18.542,48.639 cw(c19.433,48.639) BOOT.5@18.803,49.269 ; BOOT.6@18.542,46.367 cw(c18.542,44.863) 19.606,45.926 cw(c20.669,46.99) BOOT.6@19.165,46.99 ; BOOT.6@18.542,46.621 cw(c18.542,45.73) 19.172,46.36 cw(c19.802,46.99) BOOT.6@18.911,46.99 ; BOOT.5@18.542,49.53 BOOT.6@18.542,46.99 ; v1(22.352,10.287) 29.718,10.287 31.623,8.382 33.02,8.382 33.795,9.157 M1.J1_30@33.795,11.049 ; v1@22.439,10.2 cw(c22.649,9.99) 22.649,10.287 cw(c22.649,10.584) v1@22.439,10.374 ; v1@30.393,23.154 ccw(c30.183,22.944) 30.183,23.241 ccw(c30.183,23.538) v1@30.393,23.328 ; 33.547,46.228 cw(c33.547,45.901) M1.J2_31@33.778,46.132 ; M1.J2_31@33.782,46.228 30.099,46.228 28.829,44.958 20.574,44.958 BOOT.6@18.542,46.99 ; M1.J1_1@56.995,11.049 56.995,8.918 58.293,7.62 C2.1@58.293,5.461 ; C2.1@57.934,5.82 ccw(c57.067,6.687) 58.293,6.687 ccw(c59.519,6.687) C2.1@58.652,5.82 ; 68.58,31.877 68.453,33.909 64.008,38.354 64.008,49.149 59.182,53.975 14.097,53.975 v1(5.334,45.212) 5.334,44.958 5.902,44.39 J1.2@7.467,44.39 12.513,44.39 v1(12.573,44.45) C7.2@15.113,46.99 BOOT.6@18.542,46.99 ; C17.1@69.289,12.118 ccw(c68.856,12.551) 69.469,12.551 ccw(c70.082,12.551) C17.1@69.649,12.118 ; C16.1@69.289,13.282 cw(c68.856,12.849) 69.469,12.849 cw(c70.082,12.849) 69.649,13.282 cw(c70.379,12.552) 70.379,13.585 ; C17.1@69.469,11.811 C17.1@69.469,11.938 C16.1@69.469,13.462 ; C16.1@69.469,13.589 69.473,13.585 C16.1@69.592,13.585 ; 69.85,13.585 U12.12@74.168,13.585 ; U12.12@74.168,13.589 75.438,13.589 U12.33@75.692,13.335 ; U12.12@74.361,13.585 75.315,13.585 75.565,13.335 U12.33@75.692,13.335 ; U12.12@74.61,13.589 cw(c74.61,12.183) U12.33@75.604,13.177 ; R10.1@74.623,6.628 cw(c74.19,6.194) 74.803,6.194 cw(c75.416,6.194) R10.1@74.983,6.628 ; R10.1@74.803,6.731 74.803,5.969 75.184,5.588 v1(75.184,5.461) 77.47,3.175 85.852,3.175 87.376,4.699 v1(87.376,13.97) ; 74.884,5.888 cw(c74.457,5.461) v1@75.061,5.461 ; v1@75.184,5.338 cw(c75.184,5.041) 75.394,5.251 cw(c75.604,5.461) v1@75.307,5.461 ; 75.224,13.589 cw(c75.224,12.797) U12.33@75.784,13.357 ; U12.33@75.92,13.177 cw(c76.3,12.797) 76.3,13.335 cw(c76.3,13.873) U12.33@75.92,13.493 ; C36.1@76.327,35.814 C35.1@77.851,35.814 ; C36.1@76.507,35.634 cw(c76.94,35.201) 76.94,35.814 cw(c76.94,36.427) C36.1@76.507,35.994 ; U12.33@76.804,13.177 ccw(c76.424,12.797) 76.424,13.335 ccw(c76.424,13.873) U12.33@76.804,13.493 ; U12.33@76.962,13.112 cw(c76.962,12.574) 77.343,12.954 cw(c77.723,13.335) U12.33@77.185,13.335 ; 77.054,35.814 ccw(c77.054,36.687) C35.1@77.671,36.07 ; U12.33@77.411,12.095 cw(c77.741,11.18) 78.429,11.868 cw(c79.117,12.556) U12.33@78.202,12.886 ; 77.422,35.814 cw(c77.422,35.461) 77.671,35.711 cw(c77.238,35.277) 77.851,35.277 cw(c78.464,35.277) C35.1@78.031,35.711 ; U12.33@77.497,11.856 cw(c77.891,10.765) 78.712,11.585 ; v1@77.764,34.885 ccw(c77.554,35.095) 77.851,35.095 ccw(c78.148,35.095) v1@77.938,34.885 ; v1(77.851,34.798) C35.1@77.851,35.814 ; C35.1@77.851,35.89 C35.1@77.851,35.814 ; U12.33@77.939,12.135 ccw(c77.401,12.135) 77.781,12.516 ccw(c78.162,12.896) U12.33@78.162,12.358 ; U12.33@78.162,11.912 cw(c78.162,11.374) 78.543,11.754 cw(c78.923,12.135) U12.33@78.385,12.135 ; U12.33@78.441,12.8 ccw(c79.532,12.406) 78.712,11.585 ; 79.502,7.716 ccw(c80.233,7.716) v1@79.716,7.199 ; v1(79.629,7.112) 79.502,7.239 79.502,9.398 78.712,10.188 U12.24@78.712,10.734 78.712,11.585 ; R12.1@82.296,13.335 82.296,13.578 v1@82.677,13.959 ; 82.459,13.741 ccw(c82.23,13.97) v1@82.554,13.97 ; 82.486,13.768 cw(c82.677,13.577) v1@82.677,13.847 ; R12.1@82.55,13.417 cw(c83.051,13.585) v1@82.677,13.959 ; v1@82.804,13.843 v1@82.677,13.959 ; C13.1@83.628,5.893 ccw(c83.194,6.327) 83.807,6.327 ccw(c84.421,6.327) C13.1@83.987,5.893 ; C12.1@83.628,7.058 cw(c83.194,6.624) 83.807,6.624 cw(c84.421,6.624) C12.1@83.987,7.058 ; v1@83.733,6.39 cw(c83.554,6.211) 83.807,6.211 ; v1@83.733,6.564 ccw(c83.554,6.743) 83.807,6.743 ; C13.1@83.807,5.713 C12.1@83.807,7.237 ; 83.807,6.149 cw(c84.148,6.149) v1@83.907,6.39 ; 83.807,6.805 ccw(c84.148,6.805) v1@83.907,6.564 ; v1@87.289,13.883 cw(c87.079,13.673) 87.376,13.673 cw(c87.673,13.673) v1@87.463,13.883 ; U4.7@89.655,20.198 cw(c89.359,19.902) 89.777,19.902 cw(c90.195,19.902) U4.7@89.899,20.198 ; U4.7@89.777,20.32 89.777,17.594 C40.2@93.02,14.351 ; v1(90.17,2.921) 92.456,2.921 P16.2@101.092,11.557 ; v1@90.257,2.834 cw(c90.467,2.624) 90.467,2.921 cw(c90.467,3.218) v1@90.257,3.008 ; C40.2@92.247,14.351 ccw(c90.381,14.351) 91.7,15.671 ccw(c93.02,16.99) C40.2@93.02,15.124 ; C40.2@92.501,14.351 ccw(c91.248,14.351) 92.134,15.237 ccw(c93.02,16.123) C40.2@93.02,14.87 ; P16.2@100.469,11.557 cw(c98.965,11.557) 100.028,10.493 cw(c101.092,9.43) P16.2@101.092,10.934 ; P16.2@100.723,11.557 cw(c99.832,11.557) 100.462,10.927 cw(c101.092,10.297) P16.2@101.092,11.188 ; U12.33@75.692,13.335 v2(75.762,13.335) v2(76.962,13.335) 78.712,11.585
  Bottom Layer w0.203: v1@57.785,9.525 v1(57.912,9.525) 63.373,9.525 64.135,10.287 66.04,10.287 v1(69.85,14.097) v1(69.85,19.685) 68.58,20.955 v1(68.58,27.686) ; v1@58.017,9.42 cw(c58.27,9.167) 58.27,9.525 cw(c58.27,9.883) v1@58.017,9.63 ; v1@68.475,27.581 cw(c68.222,27.328) 68.58,27.328 cw(c68.938,27.328) v1@68.685,27.581 ; v1@69.702,14.097 cw(c69.343,14.097) 69.597,13.844 cw(c69.85,13.59) v1@69.85,13.949 ; v1@69.702,19.685 ccw(c69.343,19.685) 69.597,19.938 ccw(c69.85,20.192) v1@69.85,19.833 ; v1@69.745,14.202 ccw(c69.492,14.455) 69.85,14.455 ccw(c70.208,14.455) v1@69.955,14.202 ; v1@69.745,19.58 cw(c69.492,19.327) 69.85,19.327 cw(c70.208,19.327) v1@69.955,19.58 ; v1@78.309,27.382 ccw(c78.056,27.129) 78.056,27.487 ccw(c78.056,27.846) v1@78.309,27.592 ; v1@78.414,27.433 ccw(c78.414,27.914) 78.754,27.573 ; v1(78.414,27.487) 76.526,27.487 75.819,28.194 75.819,31.496 77.216,32.893 78.105,32.893 v1@79.121,33.909 ; v1@78.414,27.636 ccw(c78.414,28.607) 79.101,27.92 ; 78.668,27.487 v1(79.375,28.194) ; 78.778,33.566 cw(c79.248,33.096) v1@79.248,33.761 ; v1@79.227,28.194 cw(c78.868,28.194) 79.122,27.941 cw(c79.375,27.687) v1@79.375,28.046
  Bottom Layer w0.254: v1@5.247,45.125 cw(c5.037,44.915) 5.334,44.915 cw(c5.631,44.915) v1@5.421,45.125 ; v1@5.334,45.085 5.334,42.799 6.35,41.783 6.35,27.686 7.747,26.289 P14.2@9.398,26.289 ; P14.2@8.957,25.848 ccw(c7.894,24.785) 7.894,26.289 ccw(c7.894,27.793) P14.2@8.957,26.73 ; P14.2@9.137,26.028 ccw(c8.507,25.398) 8.507,26.289 ccw(c8.507,27.18) P14.2@9.137,26.55 ; P7.4@9.398,5.969 18.034,5.969 v1(22.352,10.287) ; P7.4@9.659,5.708 cw(c10.289,5.078) 10.289,5.969 cw(c10.289,6.86) P7.4@9.659,6.23 ; P7.4@9.839,5.528 cw(c10.902,4.465) 10.902,5.969 cw(c10.902,7.473) P7.4@9.839,6.41 ; v1@22.229,10.287 cw(c21.932,10.287) 22.142,10.077 cw(c22.352,9.867) v1@22.352,10.164 ; SD_CARD.3@27.915,26.187 ccw(c26.935,27.167) 28.321,27.167 ; C32.1@27.951,28.525 cw(c27.058,27.632) 28.321,27.632 cw(c29.584,27.632) C32.1@28.691,28.525 ; SD_CARD.3@28.095,26.007 ccw(c27.548,26.554) 28.321,26.554 ; SD_CARD.3@28.194,25.654 28.194,25.4 30.48,23.114 31.115,23.114 31.877,23.876 31.877,27.94 32.385,28.448 33.528,28.448 35.749,26.227 SD_CARD.6@35.749,25.552 ; SD_CARD.3@28.249,24.779 cw(c28.249,23.415) 29.214,24.38 ; SD_CARD.3@28.249,25.033 cw(c28.249,24.282) SD_CARD.3@28.781,24.813 ; SD_CARD.3@28.249,25.552 28.321,25.624 C32.1@28.321,28.895 ; 28.321,26.822 ccw(c29.219,26.822) SD_CARD.3@28.584,26.187 ; SD_CARD.3@28.722,25.252 ccw(c29.642,25.252) 28.992,24.602 ; 30.053,23.541 ccw(c30.48,23.968) v1@30.48,23.364 ; v1@30.567,23.328 ccw(c31.084,23.845) 31.084,23.114 ; 34.677,27.299 cw(c33.231,25.852) SD_CARD.6@35.276,25.852 ; 35.111,26.865 cw(c34.098,25.852) SD_CARD.6@35.53,25.852 ; SD_CARD.6@35.545,26.431 cw(c34.966,25.852) SD_CARD.6@35.784,25.852 ; v1@75.184,5.338 cw(c75.184,5.041) 75.394,5.251 cw(c75.604,5.461) v1@75.307,5.461 ; v1(75.184,5.461) 75.692,4.953 78.867,4.953 79.629,5.715 v1(79.629,7.112) 80.264,6.477 v1(83.82,6.477) 86.614,6.477 v1(90.17,2.921) ; v1@77.851,34.675 cw(c77.851,34.378) 78.061,34.588 cw(c78.271,34.798) v1@77.974,34.798 ; v1(77.851,34.798) 78.74,33.909 v1@79.121,33.909 ; v1@79.161,33.822 ccw(c78.951,33.612) 78.951,33.909 ccw(c78.951,34.206) v1@79.161,33.996 ; v1@79.542,7.025 cw(c79.332,6.815) 79.629,6.815 cw(c79.926,6.815) v1@79.716,7.025 ; v1@79.629,6.989 cw(c79.629,6.692) 79.839,6.902 cw(c80.049,7.112) v1@79.752,7.112 ; v1(82.677,13.97) v1(87.376,13.97) v1@87.503,13.97 ; v1@82.764,13.883 cw(c82.974,13.673) 82.974,13.97 cw(c82.974,14.267) v1@82.764,14.057 ; v1@83.733,6.39 ccw(c83.523,6.18) 83.523,6.477 ccw(c83.523,6.774) v1@83.733,6.564 ; v1@83.907,6.39 cw(c84.117,6.18) 84.117,6.477 cw(c84.117,6.774) v1@83.907,6.564 ; v1@87.289,13.883 ccw(c87.079,13.673) 87.079,13.97 ccw(c87.079,14.267) v1@87.289,14.057 ; v1@90.047,2.921 ccw(c89.75,2.921) 89.96,3.131 ccw(c90.17,3.341) v1@90.17,3.044
  Bottom Layer w2: 101.092,10.16 P16.2@101.092,11.557
  Bottom Layer w5: 91.948,20.066 91.313,19.431 ; 101.092,10.16 99.441,8.509 91.313,8.509 91.313,19.431 ; 102.489,21.209 104.775,21.209 106.426,22.86 106.426,31.155 106.172,31.409 106.172,32.893 96.774,32.893 91.313,27.432 91.313,19.431
  other v1: 92.964,31.75 79.248,33.909
  other v2: 75.762,12.135 76.962,12.135 78.162,12.135 78.162,13.335 75.762,14.535 76.962,14.535 78.162,14.535
IIC_SCL: L1.8 M1.J1_8 U12.16 U20.23 | length 79.3
  Top Layer w0.203: v1@77.343,33.761 cw(c77.343,33.402) 77.596,33.656 cw(c77.85,33.909) v1@77.491,33.909 ; v1(77.343,33.909) 78.014,33.238 U20.23@78.014,32.237
  Top Layer w0.254: v1@51.308,8.128 ccw(c51.098,8.338) 51.395,8.338 ccw(c51.692,8.338) v1@51.482,8.128 ; v1(51.395,8.041) M1.J1_8@51.395,11.049 ; v1(71.539,8.763) U12.16@74.361,11.585 ; v1@71.539,8.886 ccw(c71.539,9.183) 71.749,8.973 ccw(c71.959,8.763) v1@71.662,8.763 ; 73.895,11.119 ccw(c73.429,11.585) U12.16@74.088,11.585 ; U12.16@74.328,11.553 ccw(c74.296,11.585) U12.16@74.342,11.585 ; v1(77.343,39.37) 78.486,40.513 81.534,40.513 L1.8@81.534,43.182 ; v1@77.343,39.493 ccw(c77.343,39.79) 77.553,39.58 ccw(c77.763,39.37) v1@77.466,39.37
  Bottom Layer w0.203: v1@71.501,8.763 v1(71.539,8.763) 74.041,8.763 74.549,9.271 74.549,9.652 72.39,11.811 72.39,28.956 v1(77.343,33.909) 77.299,33.953 77.299,39.326 v1(77.343,39.37) ; v1@71.644,8.658 cw(c71.897,8.406) 71.897,8.763 cw(c71.898,9.122) v1@71.644,8.868 ; v1@77.195,33.909 cw(c76.836,33.909) 77.09,33.656 cw(c77.343,33.402) v1@77.343,33.761 ; v1@77.238,34.014 ccw(c77.09,34.162) 77.299,34.162 ; v1@77.238,39.265 cw(c77.09,39.117) 77.299,39.117 ; 77.299,34.373 ccw(c77.807,34.373) v1@77.448,34.014 ; 77.299,38.906 cw(c77.807,38.906) v1@77.448,39.265
  Bottom Layer w0.254: v1@51.395,7.918 cw(c51.395,7.621) 51.605,7.831 cw(c51.815,8.041) v1@51.518,8.041 ; v1(51.395,8.041) 52.07,7.366 70.142,7.366 v1(71.539,8.763) ; v1@71.416,8.763 cw(c71.119,8.763) 71.329,8.553 cw(c71.539,8.343) v1@71.539,8.64
IIC_SDA: L1.9 M1.J1_7 U12.17 U20.24 | length 77
  Top Layer w0.203: v1@52.092,8.868 ccw(c51.844,9.116) 52.195,9.116 ; 52.195,9.126 ccw(c52.56,9.126) v1@52.302,8.868 ; M1.J1_7@52.195,11.049 52.195,8.765 v1(52.197,8.763) ; v1(73.279,9.525) 74.676,9.525 75.212,10.061 U12.17@75.212,10.734 ; v1@73.384,9.42 cw(c73.637,9.167) 73.637,9.525 cw(c73.637,9.883) v1@73.384,9.63 ; v1@75.819,34.142 cw(c75.819,33.783) 76.072,34.037 cw(c76.326,34.29) v1@75.967,34.29 ; v1(75.819,34.29) 77.089,33.02 77.47,33.02 77.614,32.876 U20.24@77.614,32.237 ; v1(78.994,39.497) 81.788,39.497 82.042,39.751 82.042,43.174 L1.9@82.034,43.182 ; v1@79.099,39.392 cw(c79.352,39.139) 79.352,39.497 cw(c79.352,39.855) v1@79.099,39.602
  Bottom Layer w0.203: v1@52.197,8.615 cw(c52.197,8.256) 52.45,8.51 cw(c52.704,8.763) v1@52.345,8.763 ; v1(52.197,8.763) 52.705,8.255 69.723,8.255 70.993,9.525 ; v1@73.174,9.42 ccw(c72.921,9.167) 72.921,9.525 ccw(c72.921,9.883) v1@73.174,9.63 ; v1(73.279,9.525) 70.993,9.525 ; v1@75.671,34.29 cw(c75.312,34.29) 75.566,34.037 cw(c75.819,33.783) v1@75.819,34.142 ; v1@75.714,34.395 ccw(c75.461,34.648) 75.819,34.648 ccw(c76.177,34.648) v1@75.924,34.395 ; v1@78.846,39.497 ccw(c78.487,39.497) 78.741,39.75 ccw(c78.994,40.004) v1@78.994,39.645 ; v1(78.994,39.497) 78.486,40.005 76.581,40.005 75.819,39.243 v1(75.819,34.29) 71.755,30.226 71.755,10.287 70.993,9.525